# Altium PCB ESIMA_EIS_V1.11_Nutzen.PcbDoc
Units mm, origin at the board's own origin, x right, y up, seen from the top; angles counter-clockwise.
Board outline 200 x 264 mm, 4 copper layers (Top Layer, Signal Layer 1, Signal Layer 2, Bottom Layer), stack 1.583 mm thick; 49 components, 171 nets, 288 pads, 0 vias.
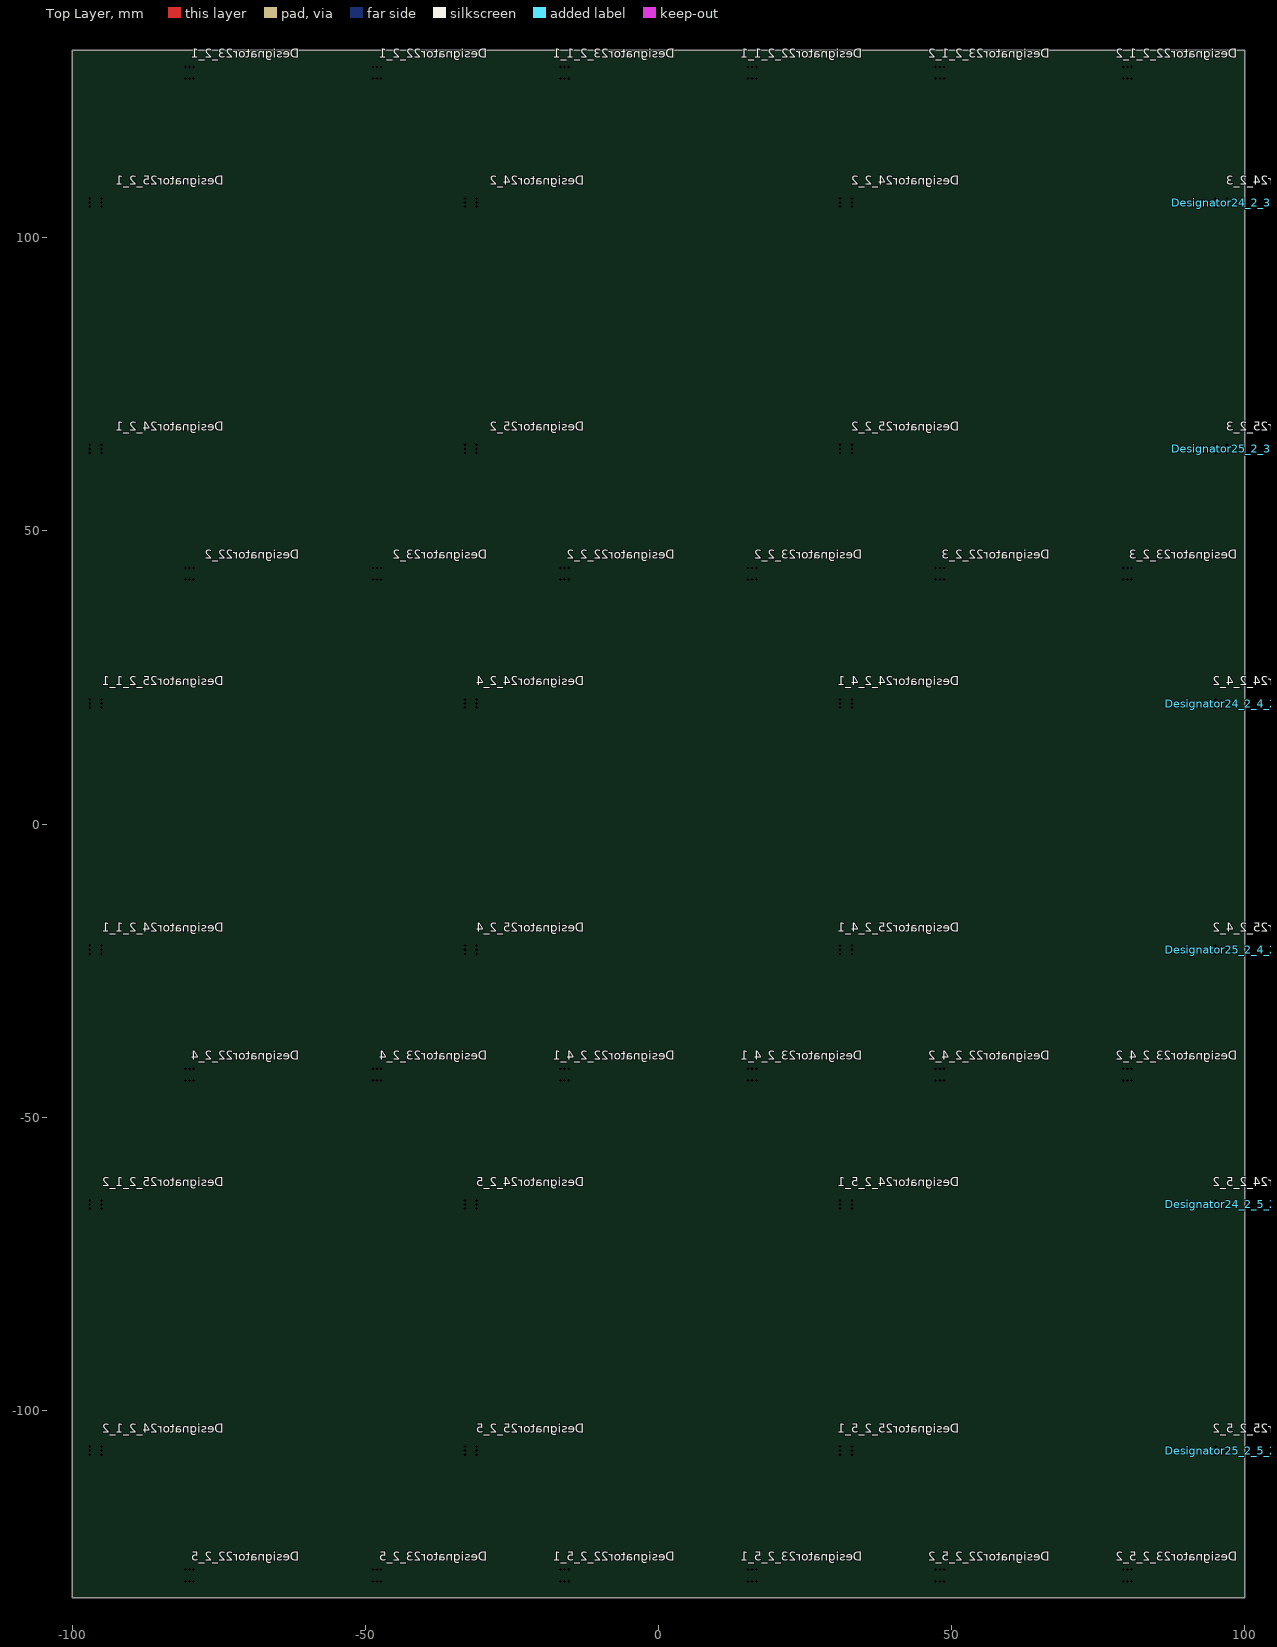
[diagram p0: Top Layer view]
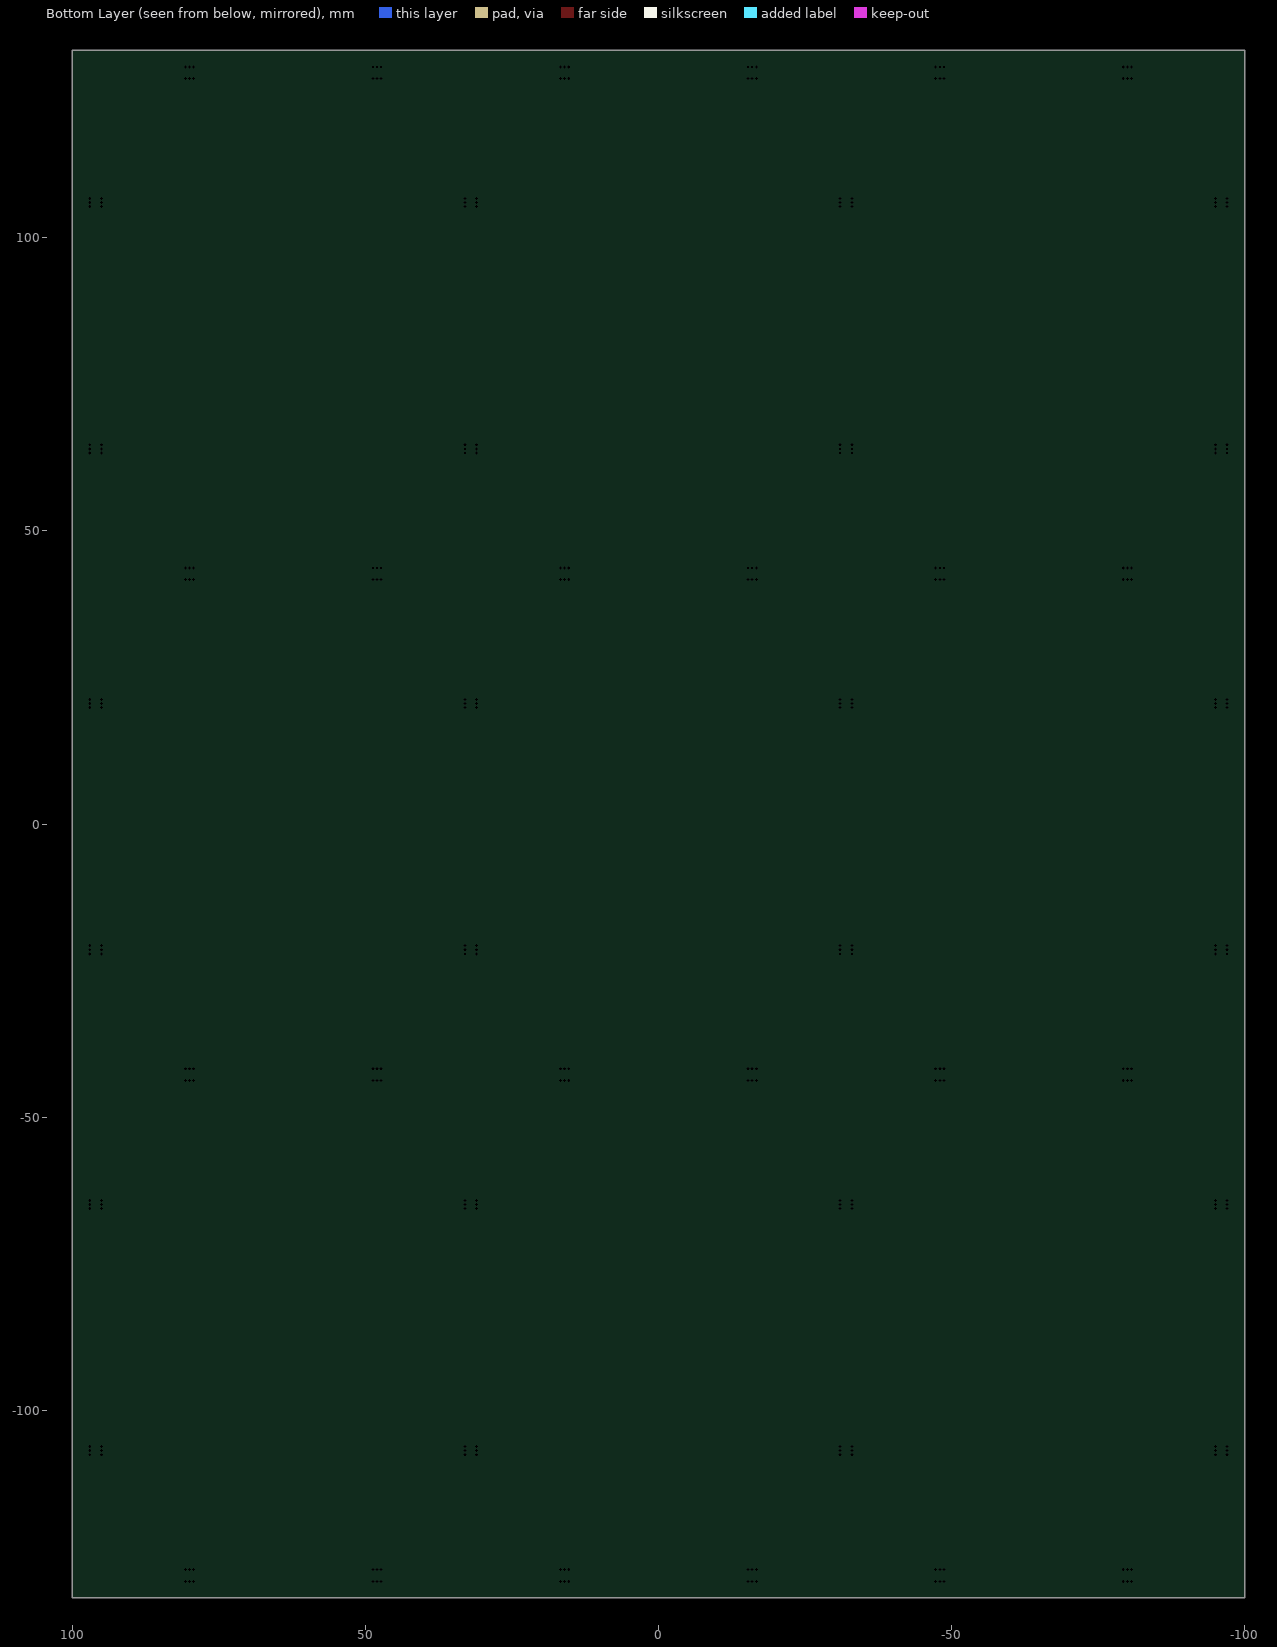
[diagram p1: Bottom Layer view, seen from below]

## Layer stack, top to bottom
Top Solder: solder mask 0.0102, Solder Resist, Dk 3.5
Top Layer: signal copper 0.0356
Dielectric1: dielectric 0.02, Dk 4.2
Signal Layer 1: signal copper 0.036
Dielectric2: core 1.4, FR-4, Dk 4.8
Signal Layer 2: signal copper 0.036
Dielectric3: dielectric 0.02, Dk 4.2
Bottom Layer: signal copper 0.0356
Bottom Solder: solder mask 0.0102, Solder Resist, Dk 3.5

## Board outline
-100,-132 -100,132 100,132 100,-132

## Design rules (kind name [scope] priority, off if disabled: settings)
Clearance Via-Trace [(IsVia) vs (IsTrack)or(isVia)] p1: gap=0.15
Clearance Via-Pad [(IsVia) vs (InPadClass('All Pads'))] p2: gap=0.15
Clearance Pad-Trace [(InPadClass('All Pads')) vs IsTrack] p3: gap=0.15
Clearance Trace-Trace [IsTrack vs IsTrack] p4: gap=0.15
Clearance [All] p5: gap=0.15
ComponentClearance [All] p1: gap=0.15 collisioncheckmode=3 verticalgap=0.4 showdistances=FALSE
DiffPairsRouting [All] p1: maxlimit=1 minlimit=0.15 mostfreqgap=0.2 toplayer_minwidth=0.15 toplayer_maxwidth=1 toplayer_prefwidth=0.2 midlayer1_minwidth=0.15 midlayer1_maxwidth=1 midlayer1_prefwidth=0.2 midlayer2_minwidth=0.15 midlayer2_maxwidth=1 midlayer2_prefwidth=0.2 bottomlayer_minwidth=0.15 bottomlayer_maxwidth=1 bottomlayer_prefwidth=0.2 maxuncoupledlength=12.7
FabricationTestPointUsage TestPointUsage [All] p1: valid=0 allowmultiple=FALSE
FabricationTestpoint Testpoint [(IsPad And (OnTopLayer Or OnBottomLayer))] p1: side=3 testpointundercomponent=TRUE minsize=0.8 maxsize=1.2 preferedsize=1 minholesize=0 maxholesize=0 preferedholesize=0 testpointgrid=0.1 allowsidetop=TRUE allowsidebottom=TRUE usegrid=TRUE gridtolerance=0
Height [All] p1: minheight=0 maxheight=14.5 prefheight=10
HoleSize [All] p1: absolutevalues=TRUE maxlimit=5.5 minlimit=0.2 maxpercent=80.000 minpercent=20.000
PlaneClearance [All] p1: clearance=0.15
PlaneConnect [All] p1: planeconnectstyle=Relief reliefexpansion=0.5 reliefentries=4 reliefconductorwidth=0.5 reliefairgap=0.2
PolygonConnect PolygonConnect_2 [All vs IsNamedPolygon('Cap_Charger')] p1: connectstyle=Relief reliefconductorwidth=-0.1 reliefentries=4 polygonreliefangle="90 Angle" airgapwidth=-0.1
PolygonConnect PolygonConnect_1 [All vs IsNamedPolygon('Cap_Charger')] p2: connectstyle=Relief reliefconductorwidth=0 reliefentries=4 polygonreliefangle="90 Angle" airgapwidth=0
PolygonConnect VIA [All vs ISVIA] p3: connectstyle=Direct reliefconductorwidth=0.254 reliefentries=4 polygonreliefangle="90 Angle" airgapwidth=0.254
PolygonConnect [All] p4: connectstyle=Relief reliefconductorwidth=0.15 reliefentries=4 polygonreliefangle="45 Angle" airgapwidth=0.15
RoutingCorners [All] p1: cornerstyle=45-Degree minsetback=0.5 maxsetback=1
RoutingVias [All] p1: holewidth=0.3 width=0.6 viastyle="Through Hole" minholewidth=0.3 minwidth=0.6 maxholewidth=0.4 maxwidth=1
SilkToSolderMaskClearance SilkscreenOverComponentPads [IsPad] p1: minsilkscreentomaskgap=0.254 clearancetoexposedcopper=TRUE
SolderMaskExpansion [All] p1: expansion=0
Width [All] p1: maxlimit=1.6 minlimit=0.15 preferedwidth=0.2
20 further rules are at their usual default settings.

## Classes and differential pairs
net class OLED_D[7..0]: OLED_D0 OLED_D1 OLED_D2 OLED_D3 OLED_D4 OLED_D5 OLED_D6 OLED_D7
component class Interface: P500 P501 S500 U500 U501
component class Designator: L201 T200 U200 U201
component class Akku: NOFP300 S300 U302

## Components (designator, comment, footprint, x,y, rotation, side; value= is the part's Value field where it differs from the comment)
Designator22_2 "Comment" "FRAESSTEG 1.5MM ABSTAND 4MM FRäSER D=2MM" -80,42.7 r180 top
Designator22_2_1 "Comment" "FRAESSTEG 1.5MM ABSTAND 4MM FRäSER D=2MM" -48,128.15 r0 top
Designator22_2_1_1 "Comment" "FRAESSTEG 1.5MM ABSTAND 4MM FRäSER D=2MM" 16,128.15 r0 top
Designator22_2_1_2 "Comment" "FRAESSTEG 1.5MM ABSTAND 4MM FRäSER D=2MM" 80,128.15 r0 top
Designator22_2_2 "Comment" "FRAESSTEG 1.5MM ABSTAND 4MM FRäSER D=2MM" -16,42.7 r180 top
Designator22_2_3 "Comment" "FRAESSTEG 1.5MM ABSTAND 4MM FRäSER D=2MM" 48,42.7 r180 top
Designator22_2_4 "Comment" "FRAESSTEG 1.5MM ABSTAND 4MM FRäSER D=2MM" -80,-42.75 r180 top
Designator22_2_4_1 "Comment" "FRAESSTEG 1.5MM ABSTAND 4MM FRäSER D=2MM" -16,-42.75 r180 top
Designator22_2_4_2 "Comment" "FRAESSTEG 1.5MM ABSTAND 4MM FRäSER D=2MM" 48,-42.75 r180 top
Designator22_2_5 "Comment" "FRAESSTEG 1.5MM ABSTAND 4MM FRäSER D=2MM" -80,-128.2 r180 top
Designator22_2_5_1 "Comment" "FRAESSTEG 1.5MM ABSTAND 4MM FRäSER D=2MM" -16,-128.2 r180 top
Designator22_2_5_2 "Comment" "FRAESSTEG 1.5MM ABSTAND 4MM FRäSER D=2MM" 48,-128.2 r180 top
Designator23_2 "Comment" "FRAESSTEG 1.5MM ABSTAND 4MM FRäSER D=2MM" -48,42.7 r180 top
Designator23_2_1 "Comment" "FRAESSTEG 1.5MM ABSTAND 4MM FRäSER D=2MM" -80,128.15 r0 top
Designator23_2_1_1 "Comment" "FRAESSTEG 1.5MM ABSTAND 4MM FRäSER D=2MM" -16,128.15 r0 top
Designator23_2_1_2 "Comment" "FRAESSTEG 1.5MM ABSTAND 4MM FRäSER D=2MM" 48,128.15 r0 top
Designator23_2_2 "Comment" "FRAESSTEG 1.5MM ABSTAND 4MM FRäSER D=2MM" 16,42.7 r180 top
Designator23_2_3 "Comment" "FRAESSTEG 1.5MM ABSTAND 4MM FRäSER D=2MM" 80,42.7 r180 top
Designator23_2_4 "Comment" "FRAESSTEG 1.5MM ABSTAND 4MM FRäSER D=2MM" -48,-42.75 r180 top
Designator23_2_4_1 "Comment" "FRAESSTEG 1.5MM ABSTAND 4MM FRäSER D=2MM" 16,-42.75 r180 top
Designator23_2_4_2 "Comment" "FRAESSTEG 1.5MM ABSTAND 4MM FRäSER D=2MM" 80,-42.75 r180 top
Designator23_2_5 "Comment" "FRAESSTEG 1.5MM ABSTAND 4MM FRäSER D=2MM" -48,-128.2 r180 top
Designator23_2_5_1 "Comment" "FRAESSTEG 1.5MM ABSTAND 4MM FRäSER D=2MM" 16,-128.2 r180 top
Designator23_2_5_2 "Comment" "FRAESSTEG 1.5MM ABSTAND 4MM FRäSER D=2MM" 80,-128.2 r180 top
Designator24_2 "Comment" "FRAESSTEG 1.5MM ABSTAND 4MM FRäSER D=2MM" -32,106 r90 top
Designator24_2_1 "Comment" "FRAESSTEG 1.5MM ABSTAND 4MM FRäSER D=2MM" -96,64 r270 top
Designator24_2_1_1 "Comment" "FRAESSTEG 1.5MM ABSTAND 4MM FRäSER D=2MM" -96,-21.45 r270 top
Designator24_2_1_2 "Comment" "FRAESSTEG 1.5MM ABSTAND 4MM FRäSER D=2MM" -96,-106.9 r270 top
Designator24_2_2 "Comment" "FRAESSTEG 1.5MM ABSTAND 4MM FRäSER D=2MM" 32,106 r90 top
Designator24_2_3 "Comment" "FRAESSTEG 1.5MM ABSTAND 4MM FRäSER D=2MM" 96,106 r90 top
Designator24_2_4 "Comment" "FRAESSTEG 1.5MM ABSTAND 4MM FRäSER D=2MM" -32,20.55 r90 top
Designator24_2_4_1 "Comment" "FRAESSTEG 1.5MM ABSTAND 4MM FRäSER D=2MM" 32,20.55 r90 top
Designator24_2_4_2 "Comment" "FRAESSTEG 1.5MM ABSTAND 4MM FRäSER D=2MM" 96,20.55 r90 top
Designator24_2_5 "Comment" "FRAESSTEG 1.5MM ABSTAND 4MM FRäSER D=2MM" -32,-64.9 r90 top
Designator24_2_5_1 "Comment" "FRAESSTEG 1.5MM ABSTAND 4MM FRäSER D=2MM" 32,-64.9 r90 top
Designator24_2_5_2 "Comment" "FRAESSTEG 1.5MM ABSTAND 4MM FRäSER D=2MM" 96,-64.9 r90 top
Designator25_2 "Comment" "FRAESSTEG 1.5MM ABSTAND 4MM FRäSER D=2MM" -32,64 r90 top
Designator25_2_1 "Comment" "FRAESSTEG 1.5MM ABSTAND 4MM FRäSER D=2MM" -96,106 r270 top
Designator25_2_1_1 "Comment" "FRAESSTEG 1.5MM ABSTAND 4MM FRäSER D=2MM" -96,20.55 r270 top
Designator25_2_1_2 "Comment" "FRAESSTEG 1.5MM ABSTAND 4MM FRäSER D=2MM" -96,-64.9 r270 top
Designator25_2_2 "Comment" "FRAESSTEG 1.5MM ABSTAND 4MM FRäSER D=2MM" 32,64 r90 top
Designator25_2_3 "Comment" "FRAESSTEG 1.5MM ABSTAND 4MM FRäSER D=2MM" 96,64 r90 top
Designator25_2_4 "Comment" "FRAESSTEG 1.5MM ABSTAND 4MM FRäSER D=2MM" -32,-21.45 r90 top
Designator25_2_4_1 "Comment" "FRAESSTEG 1.5MM ABSTAND 4MM FRäSER D=2MM" 32,-21.45 r90 top
Designator25_2_4_2 "Comment" "FRAESSTEG 1.5MM ABSTAND 4MM FRäSER D=2MM" 96,-21.45 r90 top
Designator25_2_5 "Comment" "FRAESSTEG 1.5MM ABSTAND 4MM FRäSER D=2MM" -32,-106.9 r90 top
Designator25_2_5_1 "Comment" "FRAESSTEG 1.5MM ABSTAND 4MM FRäSER D=2MM" 32,-106.9 r90 top
Designator25_2_5_2 "Comment" "FRAESSTEG 1.5MM ABSTAND 4MM FRäSER D=2MM" 96,-106.9 r90 top
NOFP300 "No-Footprint" No_Footprint 423.95,404.4 r90 top

## Footprints (in the part's own frame and the unit in brackets; to place one, negate y for a bottom-side part, rotate by r counter-clockwise, add the part's x,y. Pads: shape width x height; smd on the part's side, far side on the other; paste and mask are expansions set on the pad)
"FRAESSTEG 1.5MM ABSTAND 4MM FRäSER D=2MM" [mm] "Fraessteg 1.5mm Abstand 4mm Fräser d=2mm"
  round 0 hole 0.5: 1(-0.7,1) 1(-0.7,-1) 2(0,1) 2(0,-1) 3(0.7,1) 3(0.7,-1)
No_Footprint [mm] "No-Footprint"

## Part data
NOFP300: "Dummy-Bauteil, um Zusatzbestellungen in die BOM einzutragen"

## Nets (pads, with @x,y where several pads share a name; then routed paths per layer and width w, separated by ;. In a path a pad name is that pad's centre, name@x,y a point inside that pad or via, vN(x,y) a via of type N, cw(c..) or ccw(c..) an arc to the next point about the centre after c; other vN are vias at no path point)
3V: 
12.5V: 
A3V: 
A6V: 
AGND: 
AKKU+: 
AKKU_NTC: 
CC_CLK: 
CC_CS: 
CC_MISO: 
CC_MOSI: 
CC_P0.0: 
CC_P0.1: 
CC_P0.2: 
CC_P0.3: 
CC_P0.4: 
CC_P0.5: 
CC_P0.6: 
CC_P0.7: 
CC_P1.0: 
CC_P1.1: 
CC_P1.2: 
CC_P1.3: 
CC_P2.0: 
CC_P2.1: 
CC_P2.2: 
CC_RESET: 
CO2_EN: 
CO2_SCL: 
CO2_SDA: 
DAC_LOAD: 
DMAE0: 
FLOW_HTS_DAC: 
FLOW_HTS_SD: 
FLOW_TEMP_DIODE: 
FLOW_TP1: 
FLOW_TP2: 
FLOW_TPT1: 
GND: 
GND_BQ: 
LEDGE: 
LEDGN: 
LIGHT_IRQ: 
LIGHT_SCL: 
LIGHT_SDA: 
MSP_RESET: 
NetC101_2: 
NetC103_1: 
NetC105_2: 
NetC107_2: 
NetC108_1: 
NetC109_2: 
NetC110_1: 
NetC111_2: 
NetC112_1: 
NetC113_2: 
NetC201_1: 
NetC201_2: 
NetC202_1: 
NetC202_2: 
NetC207_2: 
NetC208_2: 
NetC211_1: 
NetC300_2: 
NetC301_2: 
NetC303_1: 
NetC304_1: 
NetC308_2: 
NetC502_1: 
NetD100_1: 
NetD101_1: 
NetIC300_9: 
NetIC300_10: 
NetIC400_P1_2: 
NetIC400_P1_8: 
NetIC400_P2_1: 
NetIC400_P2_3: 
NetIC400_P2_4: 
NetIC400_P2_5: 
NetIC400_P2_6: 
NetIC400_P2_8: 
NetIC400_P2_10: 
NetIC400_P2_11: 
NetIC400_P2_12: 
NetIC400_P2_13: 
NetIC400_P2_14: 
NetIC400_P2_16: 
NetIC400_P2_20: 
NetIC500_1: 
NetIC500_3: 
NetIC500_4: 
NetIC500_6: 
NetJ300_2: 
NetL200_2: 
NetL201_2: 
NetP500_5: 
NetP500_6: 
NetP500_7: 
NetP500_13: 
NetP500_14: 
NetP500_15: 
NetP500_16: 
NetP501_1: 
NetP501_3: 
NetP501_4: 
NetP501_5: 
NetP501_6: 
NetP501_7: 
NetP501_8: 
NetR102_2: 
NetR107_1: 
NetR107_2: 
NetR207_1: 
NetR304_2: 
NetR305_2: 
NetR306_2: 
NetR307_2: 
NetR309_1: 
NetR310_1: 
NetR310_2: 
NetR311_2: 
NetR312_2: 
NetR316_1: 
NetR500_1: 
NetR503_2: 
NetST600_2: 
NetST600_3: 
NetST600_6: 
NetST600_9: 
NetST600_10: 
NetTP100_1: 
NetTP101_1: 
NetU100_5: 
NetU100_6: 
NetU100_7: 
NetU100_8: 
NetU100_52: 
NetU100_53: 
NetU100_91: 
NetU100_92: 
NetU100_93: 
NetU100_94: 
NetU100_95: 
OLED_D0: 
OLED_D1: 
OLED_D2: 
OLED_D3: 
OLED_D4: 
OLED_D5: 
OLED_D6: 
OLED_D7: 
REF1.25V: 
REF2.5V: 
RF.CS: 
RF.DATAREADY: 
RF.MISO: 
RF.MOSI: 
RF.ONOFF: 
RF.RESET: 
RF.SCLK: 
SRN: 
SRP: 
SYS_POWER: 
TBCCR1: 
UCA1CLK: 
UCA1SIMO: 
UCB1_SCL: 
UCB1_SDA: 
USB_5V: 
USB_DM: 
USB_DP: 
pads on no net: Designator22_2.1 Designator22_2.2 Designator22_2.3 Designator22_2_1.1 Designator22_2_1.2 Designator22_2_1.3 Designator22_2_1_1.1 Designator22_2_1_1.2 Designator22_2_1_1.3 Designator22_2_1_2.1 Designator22_2_1_2.2 Designator22_2_1_2.3 Designator22_2_2.1 Designator22_2_2.2 Designator22_2_2.3 Designator22_2_3.1 Designator22_2_3.2 Designator22_2_3.3 Designator22_2_4.1 Designator22_2_4.2 Designator22_2_4.3 Designator22_2_4_1.1 Designator22_2_4_1.2 Designator22_2_4_1.3 Designator22_2_4_2.1 Designator22_2_4_2.2 Designator22_2_4_2.3 Designator22_2_5.1 Designator22_2_5.2 Designator22_2_5.3 Designator22_2_5_1.1 Designator22_2_5_1.2 Designator22_2_5_1.3 Designator22_2_5_2.1 Designator22_2_5_2.2 Designator22_2_5_2.3 Designator23_2.1 Designator23_2.2 Designator23_2.3 Designator23_2_1.1 Designator23_2_1.2 Designator23_2_1.3 Designator23_2_1_1.1 Designator23_2_1_1.2 Designator23_2_1_1.3 Designator23_2_1_2.1 Designator23_2_1_2.2 Designator23_2_1_2.3 Designator23_2_2.1 Designator23_2_2.2 Designator23_2_2.3 Designator23_2_3.1 Designator23_2_3.2 Designator23_2_3.3 Designator23_2_4.1 Designator23_2_4.2 Designator23_2_4.3 Designator23_2_4_1.1 Designator23_2_4_1.2 Designator23_2_4_1.3 Designator23_2_4_2.1 Designator23_2_4_2.2 Designator23_2_4_2.3 Designator23_2_5.1 Designator23_2_5.2 Designator23_2_5.3 Designator23_2_5_1.1 Designator23_2_5_1.2 Designator23_2_5_1.3 Designator23_2_5_2.1 Designator23_2_5_2.2 Designator23_2_5_2.3 Designator24_2.1 Designator24_2.2 Designator24_2.3 Designator24_2_1.1 Designator24_2_1.2 Designator24_2_1.3 Designator24_2_1_1.1 Designator24_2_1_1.2 Designator24_2_1_1.3 Designator24_2_1_2.1 Designator24_2_1_2.2 Designator24_2_1_2.3 Designator24_2_2.1 Designator24_2_2.2 Designator24_2_2.3 Designator24_2_3.1 Designator24_2_3.2 Designator24_2_3.3 Designator24_2_4.1 Designator24_2_4.2 Designator24_2_4.3 Designator24_2_4_1.1 Designator24_2_4_1.2 Designator24_2_4_1.3 Designator24_2_4_2.1 Designator24_2_4_2.2 Designator24_2_4_2.3 Designator24_2_5.1 Designator24_2_5.2 Designator24_2_5.3 Designator24_2_5_1.1 Designator24_2_5_1.2 Designator24_2_5_1.3 Designator24_2_5_2.1 Designator24_2_5_2.2 Designator24_2_5_2.3 Designator25_2.1 Designator25_2.2 Designator25_2.3 Designator25_2_1.1 Designator25_2_1.2 Designator25_2_1.3 Designator25_2_1_1.1 Designator25_2_1_1.2 Designator25_2_1_1.3 Designator25_2_1_2.1 Designator25_2_1_2.2 Designator25_2_1_2.3 Designator25_2_2.1 Designator25_2_2.2 Designator25_2_2.3 Designator25_2_3.1 Designator25_2_3.2 Designator25_2_3.3 Designator25_2_4.1 Designator25_2_4.2 Designator25_2_4.3 Designator25_2_4_1.1 Designator25_2_4_1.2 Designator25_2_4_1.3 Designator25_2_4_2.1 Designator25_2_4_2.2 Designator25_2_4_2.3 Designator25_2_5.1 Designator25_2_5.2 Designator25_2_5.3 Designator25_2_5_1.1 Designator25_2_5_1.2 Designator25_2_5_1.3 Designator25_2_5_2.1 Designator25_2_5_2.2 Designator25_2_5_2.3

## Silkscreen, mask and mechanical layers (free items; w line width, h text height)
Contur Nutzen:
  drawing of 179 lines, arcs and shapes, not listed
Contur Pastenschablone Nutzen:
  drawing of 7136 lines, arcs and shapes, not listed

## Dimensions
100,132 to -100,132 on Dimension
-100,132 to -100,-132 on Dimension

## Panel: embedded boards
"ESIMA_EIS_V1.11.PcbDoc" at 94.964,-127.181, 3 rows x 3 columns, spacing 64 x 85.45, rotation 90